# Altium PCB LCC_PCB.PcbDoc (part 2 of 2)
Units mm, origin at the board's own origin, x right, y up, seen from the top; angles counter-clockwise.
Board outline 253 x 208 mm, 4 copper layers (Top Layer, Layer 1, Layer 2, Bottom Layer), stack 0.603 mm thick; 172 components, 110 nets, 492 pads, 79 vias.
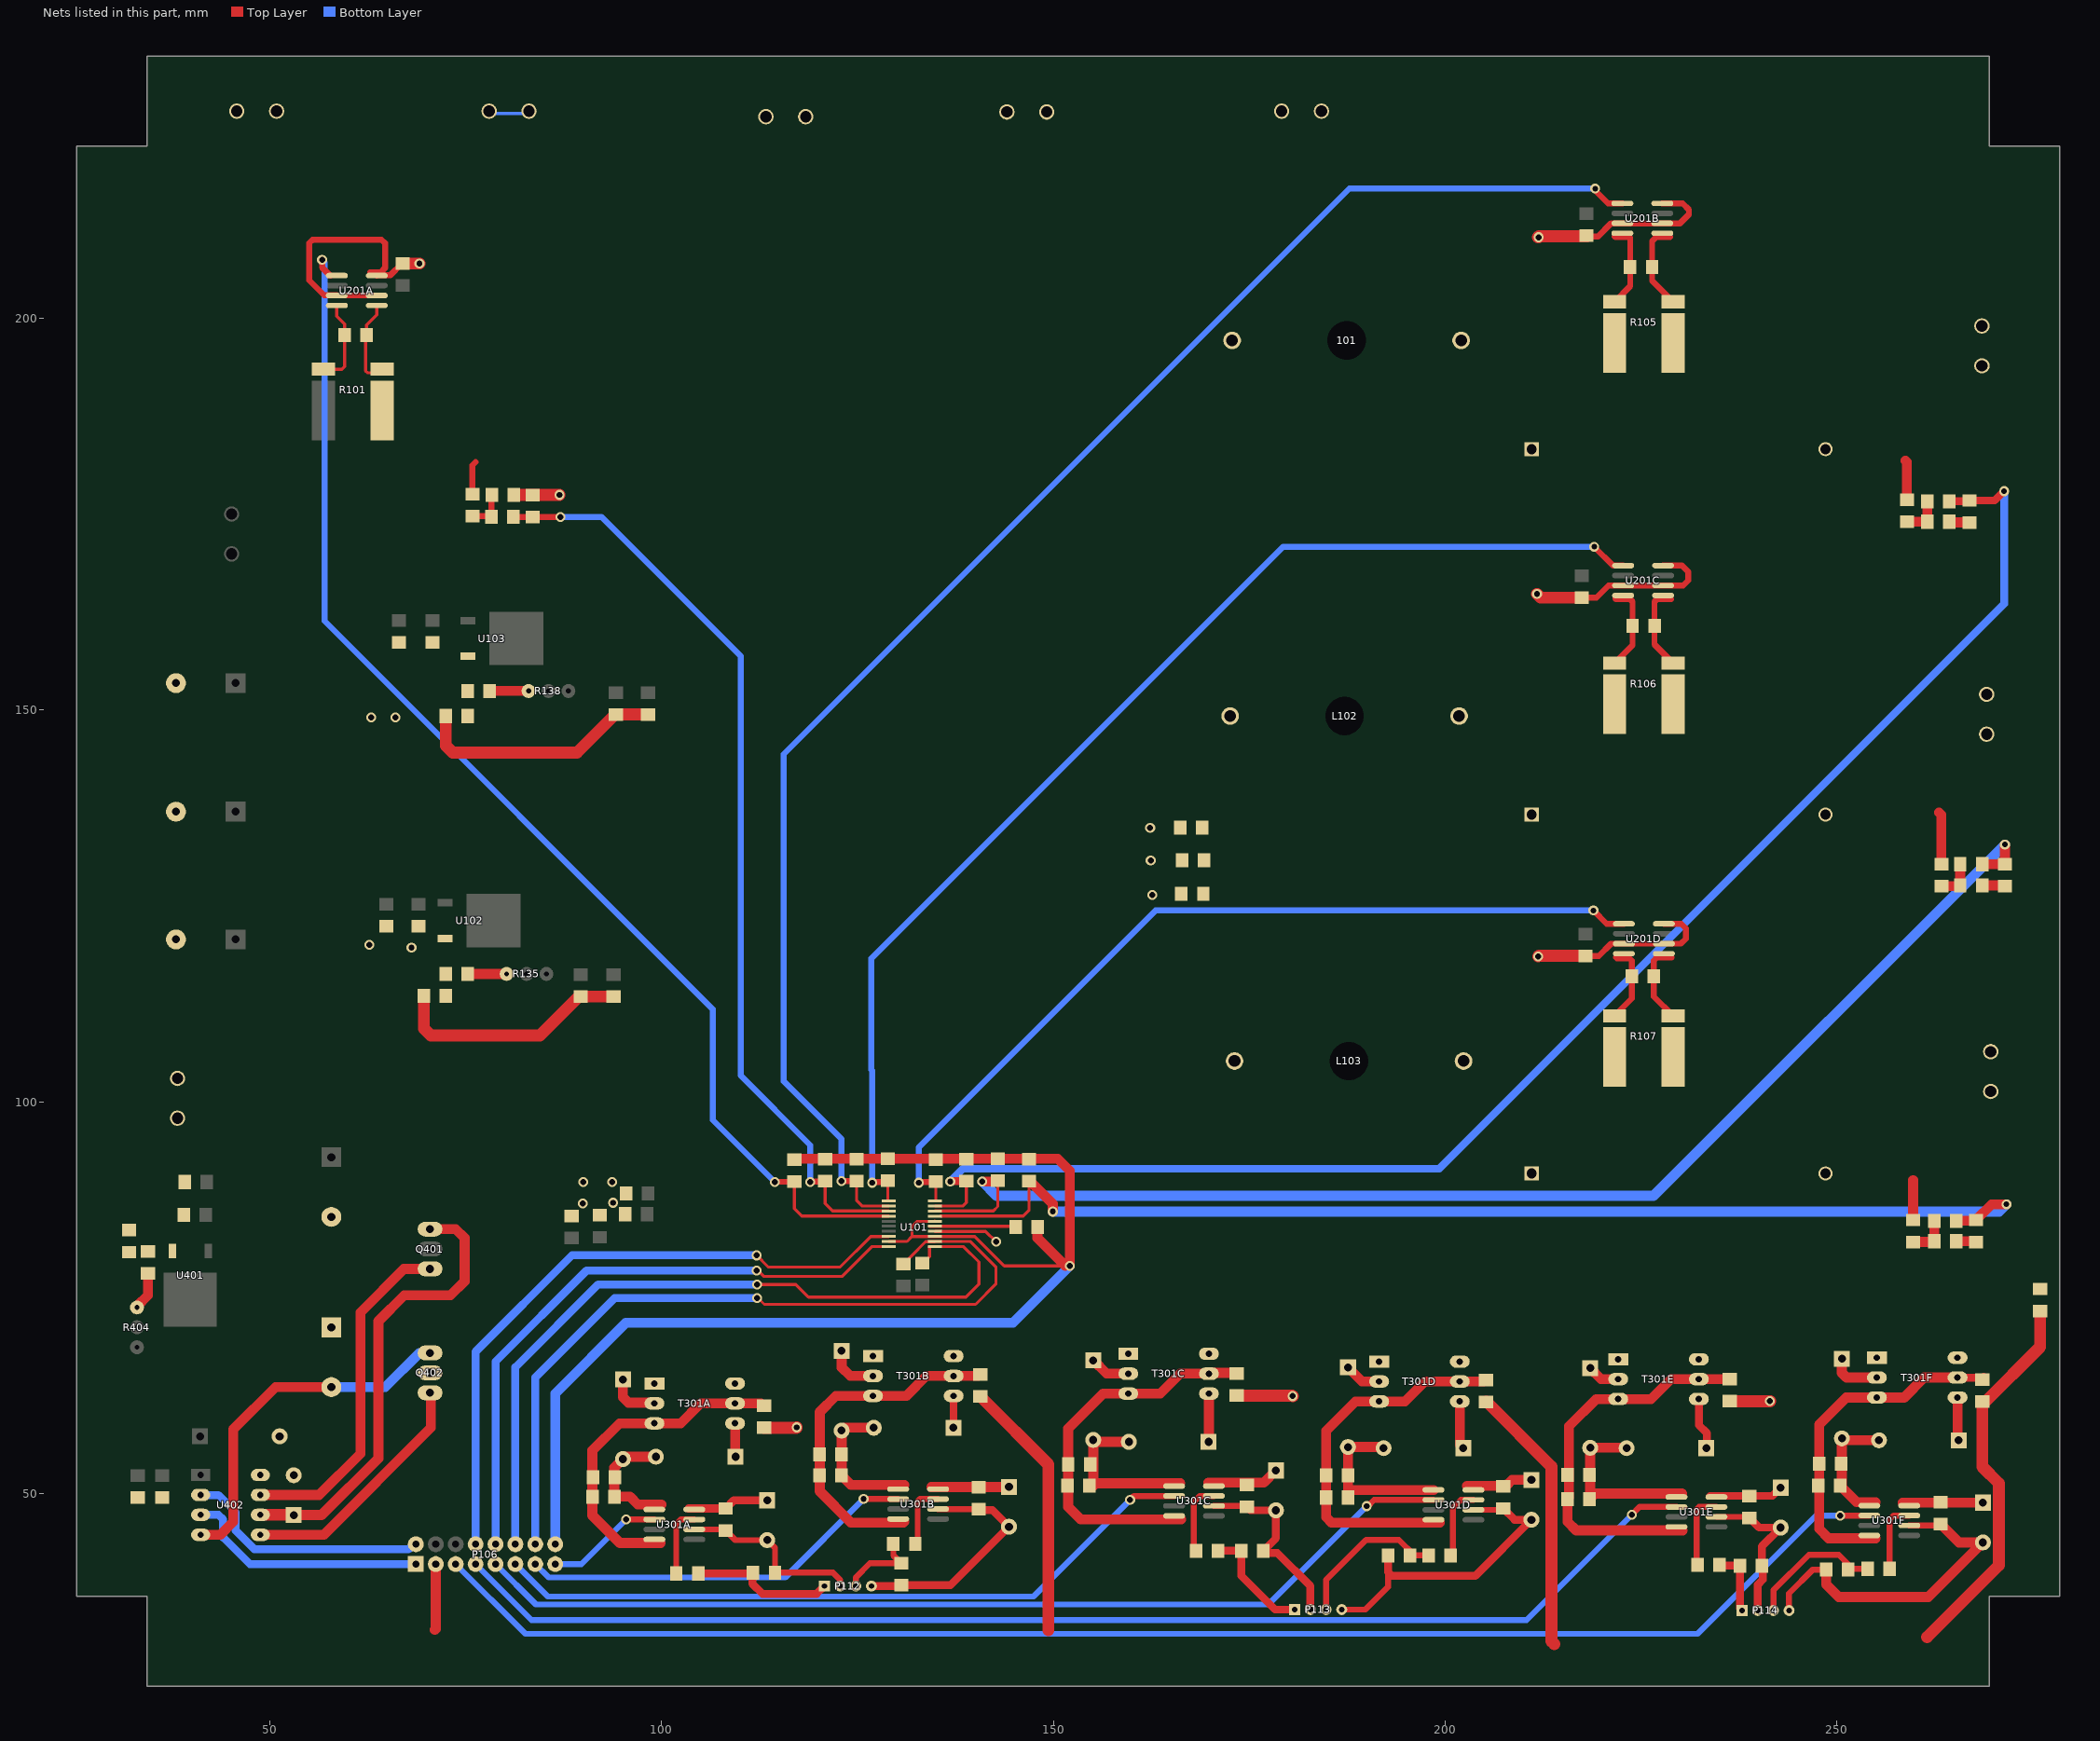
[diagram p4: the nets of this part, all layers, seen from the top]

## Via types
v1: diameter 1.27, hole 0.762, Top Layer to Bottom Layer, 47 vias
v2: diameter 1.27, hole 0.381, Top Layer to Bottom Layer, 22 vias
v3: diameter 1.27, hole 0.711, Top Layer to Bottom Layer, 6 vias
v4: diameter 5, hole 3, Top Layer to Bottom Layer, 4 vias

## Nets (pads, with @x,y where several pads share a name; then routed paths per layer and width w, separated by ;. In a path a pad name is that pad's centre, name@x,y a point inside that pad or via, vN(x,y) a via of type N, cw(c..) or ccw(c..) an arc to the next point about the centre after c; other vN are vias at no path point) (continued)
GND: C101.2 C102.2 C103.2 C104.1 C116.1 C117.1 C118.1 C119.1 C120.1 C121.1 C122.1 C123.1 C124.1 C125.1 C126.1 C127.1 C128.1 C201A.1 C201B.1 C201C.1 C201D.1 C401.1 C402.1 C403.1 C404.1 C407.2 P102.1 P102.2 P106.3 P106.16 P108.1 P108.2 Q402.3 R104.1 R109.2 R123.1 R124.1 R125.1 R126.1 R127.1 R128.1 R129.1 R130.1 R133.1 R136.1 R139.1 R142.1 R143.2 R306A.2 R306B.2 R306C.2 R306D.2 R306E.2 R306F.2 R402.1 U101.3 U101.4 U101.6 U101.19 U201A.2 U201A.4 U201A.7 U201B.2 U201B.4 U201B.7 U201C.2 U201C.4 U201C.7 U201D.2 U201D.4 U201D.7 U402.4 | length 551
  Top Layer w0.381: U101.19@129.007,82.15 129.013,82.15 129.028,82.165 131.339,82.165 131.974,82.8 ; U101.4@134.9,83.45 141.365,83.45 v1(142.697,82.118) ; U101.6@134.9,84.75 134.864,84.75 134.849,84.735 132.639,84.735 131.974,84.07 131.974,82.8 ; v1(152.121,79.045) 151.549,79.045 143.739,79.045 139.983,82.8 U101.3@134.9,82.8 131.974,82.8
  Top Layer w0.762: 62.84,205.816 64.186,205.816 64.745,206.375 64.745,209.535 64.298,209.982 55.514,209.982 55.067,209.535 55.067,204.8 56.979,202.888 58.565,202.888 U201A.7@58.596,202.857 U201A.2@63.696,202.857 ; U201A.4@63.696,205.397 63.727,205.428 65.399,205.428 66.905,206.934 C201A.1@67.005,206.934 ; C201C.1@217.4,164.3 219.3,164.3 220.857,165.857 U201C.7@222.696,165.857 U201C.2@227.796,165.857 230.357,165.857 231,166.5 231,167.6 230.203,168.397 U201C.4@227.796,168.397 ; C201D.1@217.9,118.6 219.6,118.6 221.157,120.157 U201D.7@222.796,120.157 U201D.2@227.896,120.157 230.057,120.157 230.7,120.8 230.7,122.1 230.103,122.697 U201D.4@227.896,122.697 ; C201B.1@218.1,210.4 219.5,210.4 221.17,212.07 U201B.7@222.6,212.07 U201B.2@227.7,212.07 229.97,212.07 231.1,213.2 231.1,213.8 230.3,214.6 227.71,214.6 U201B.4@227.7,214.61
  Top Layer w1.27: U402.4@41.221,44.746 43.746,44.746 45.4,46.4 45.4,58.2 50.78,63.58 C407.2@57.9,63.58 ; 71.1,32.6 71.22,32.72 P106.3@71.22,41 ; R128.1@116.963,92.6 117.098,92.735 124.895,92.735 135,92.735 150.546,92.735 152.121,91.161 v1(152.121,79.045) ; C120.1@147.986,84.023 147.986,82.607 v1@151.549,79.045
  Top Layer w1.524: C201A.1@67.005,206.934 v1(69.139,206.934) ; R133.1@69.7,113.5 69.7,109.325 70.593,108.433 84.506,108.433 89.484,113.411 89.495,113.4 C124.1@89.7,113.4 C123.1@93.9,113.4 ; R136.1@72.5,149.2 72.5,145.419 73.393,144.526 89.226,144.526 94.1,149.4 C127.1@94.2,149.4 C128.1@98.3,149.4 ; R104.1@81.2,177.4 81.219,177.419 v1(86.995,177.419) ; R306A.2@113.1,58.4 117.226,58.4 v1(117.272,58.445) ; R306B.2@140.7,62.4 140.8,62.4 140.838,62.362 140.838,62.262 149.377,53.723 149.377,32.588 ; R306C.2@173.4,62.5 180.476,62.5 v1(180.543,62.433) ; R306D.2@205.2,61.7 205.3,61.7 213.538,53.462 213.538,31.191 213.919,30.81 ; v1(211.709,164.77) 212.179,164.3 C201C.1@217.4,164.3 ; v1(211.861,118.516) 211.945,118.6 C201D.1@217.9,118.6 ; v1(211.912,210.287) 211.836,210.287 211.949,210.4 C201B.1@218.1,210.4 ; R306E.2@236.3,61.8 236.327,61.773 241.452,61.773 241.427,61.798 v1(241.402,61.798) ; 261.469,31.695 270.632,40.858 270.632,51.323 268.53,53.425 R306F.2@268.53,61.594 ; R306F.2@268.53,61.73 R306F.2@268.53,61.594 ; R139.1@275.895,73.304 275.895,68.707 268.656,61.468 R306F.2@268.53,61.594
  Bottom Layer w1.27: C407.2@57.9,63.58 64.78,63.58 69.14,67.94 Q402.3@70.5,67.94 ; P106.16@86.2,43.5 P106.16@86.24,43.54 ; P106.16@86.46,43.54 P106.16@86.24,43.54 ; v1(152.121,79.045) 144.856,71.78 95.48,71.78 86.46,62.76 86.46,43.76 P106.16@86.24,43.54
  other v1: 89.967,86.995 93.853,87.097 90.043,89.738 93.726,89.738 68.123,119.659 62.738,120.015 162.636,126.365 162.433,130.785 162.357,134.925 62.967,149.022 66.091,149.022
HIN1: P106.15 U301A.2 | length 15
  Top Layer w0.762: v1(95.5,46.7) 95.507,46.693 U301A.2@99.104,46.693
  Bottom Layer w0.762: P106.15@86.46,41 89.8,41 v1(95.5,46.7)
HIN2: P106.13 U301B.2 | length 51.1
  Top Layer w0.762: v1(125.8,49.3) 125.807,49.293 U301B.2@130.204,49.293
  Bottom Layer w0.762: P106.13@83.92,41 85.62,39.3 115.8,39.3 v1(125.8,49.3)
HIN3: P106.11 U301C.2 | length 91.1
  Top Layer w0.762: v1(159.8,49.2) 160.293,49.693 U301C.2@165.404,49.693
  Bottom Layer w0.762: P106.11@81.38,41 85.515,36.865 147.465,36.865 v1(159.8,49.2)
HIN4: P106.9 U301D.2 | length 127.3
  Top Layer w0.762: v1(190,48.4) 190.137,48.4 190.93,49.193 U301D.2@198.504,49.193
  Bottom Layer w0.762: P106.9@78.84,41 83.991,35.849 177.449,35.849 v1(190,48.4)
HIN5: P106.7 U301E.2 | length 162.3
  Top Layer w0.762: v1(223.8,47.3) 224.793,48.293 U301E.2@229.504,48.293
  Bottom Layer w0.762: P106.7@76.1,41 P106.7@76.3,41 83.435,33.865 210.365,33.865 v1(223.8,47.3)
HIN6: P106.5 U301F.2 | length 190.3
  Top Layer w0.762: v1(250.407,47.193) U301F.2@254.104,47.193
  Bottom Layer w0.762: P106.5@73.76,41 82.66,32.1 232.2,32.1 247.293,47.193 v1(250.407,47.193)
HINP: P106.2 U402.2 | length 32
  Bottom Layer w1: U402.2@41.221,49.826 41.247,49.8 43.5,49.8 45.7,47.6 45.7,45.275 48.075,42.9 67.761,42.9 68.401,43.54 P106.2@68.68,43.54
HN: C405.1 Q401.3 Q402.2 T301A.1 T301B.1 T301C.1 T301D.1 T301E.1 T301F.1 U402.6 | length 59.1
  Top Layer w1.27: C405.1@53.1,47.26 56.66,47.26 63.9,54.5 63.9,72 67.2,75.3 73.1,75.3 74.9,77.1 74.9,82.6 73.76,83.74 Q401.3@70.5,83.74
  Top Layer w1.524: U402.6@48.841,47.286 53.074,47.286 C405.1@53.1,47.26
HO: Q401.1 U402.7 | length 44.1
  Top Layer w1.27: U402.7@48.841,49.826 56.326,49.826 61.6,55.1 61.6,73.1 67.16,78.66 Q401.1@70.5,78.66
HO1: P112.1 R303A.2 R304A.1 | length 18.4
  Top Layer w1: R303A.2@104.7,39.8 111.6,39.8 111.6,38.5 112.9,37.2 119.8,37.2 P112.1@120.8,38.2
HO2: P112.3 R303B.2 R304B.1 | length 10.6
  Top Layer w0.762: P112.3@124.8,38.2 124.8,39.3 126.6,41.1 R304B.1@130.6,41.1 129.6,42.1 R303B.2@129.6,43.6
HO3: P113.1 R303C.2 R304C.1 | length 14.8
  Top Layer w1: R303C.2@171,42.7 R304C.1@174,42.7 174,39.5 178.3,35.2 P113.1@180.8,35.2
HO4: P113.3 R303D.2 R304D.1 | length 22.2
  Top Layer w0.762: P113.3@184.8,35.2 184.8,39 189.9,44.1 194.1,44.1 196.1,42.1 R303D.2@197.9,42.1 R304D.1@195.5,42.1
HO5: P114.1 R303E.2 R304E.1 | length 8.5
  Top Layer w1: R303E.2@235,40.9 235.1,40.8 R304E.1@237.6,40.8 237.6,35.346 P114.1@237.866,35.08
HO6: P114.3 R303F.2 R304F.1 | length 17.7
  Top Layer w0.762: P114.3@241.866,35.08 241.866,37.666 246.4,42.2 250.2,42.2 251.4,41 R304F.1@251.4,40.3 251.5,40.4 253.5,40.4 R303F.2@253.9,40.4
IS+1: C111.2 R101.2 U201A.8 | length 11
  Top Layer w0.381: R101.2@56.905,193.449 59.249,193.449 59.6,193.8 C111.2@59.6,197.8 59.6,199.2 58.596,200.204 U201A.8@58.596,201.587
IS+2: C112.2 R105.2 U201B.8 | length 11.1
  Top Layer w0.762: R105.2@221.6,202.058 223.6,204.058 C112.2@223.6,206.5 223.6,210.2 223.5,210.3 221.7,210.3 221.6,210.4
IS+3: C113.2 R106.2 U201C.8 | length 11.2
  Top Layer w0.762: R106.2@221.6,155.958 223.9,158.258 C113.2@223.9,160.7 223.9,163.8 223.6,164.1 221.8,164.1 221.7,164.2
IS+4: C114.2 R107.2 U201D.8 | length 10.1
  Top Layer w0.762: R107.2@221.6,110.958 223.8,113.158 C114.2@223.8,116 223.8,118 223.5,118.3 221.9,118.3 221.8,118.4
IS-1: C111.1 R101.3 U201A.1 | length 11.3
  Top Layer w0.381: U201A.1@63.696,201.587 63.696,200.396 62.4,199.1 C111.1@62.4,197.8 62.271,197.671 62.271,193.223 62.494,193 63.924,193 R101.3@64.373,193.449
IS-2: C112.1 R105.3 U201B.1 | length 11.4
  Top Layer w0.762: 228.7,210.3 226.9,210.3 226.4,209.8 C112.1@226.4,206.5 226.4,204.725 R105.3@229.068,202.058
IS-3: C113.1 R106.3 U201C.1 | length 11
  Top Layer w0.762: 228.8,164.1 227,164.1 226.7,163.8 C113.1@226.7,160.7 226.7,158.325 R106.3@229.068,155.958
IS-4: C114.1 R107.3 U201D.1 | length 10.5
  Top Layer w0.762: 228.9,118.4 227,118.4 226.6,118 C114.1@226.6,116 226.6,113.425 R107.3@229.068,110.958
ISO1: R128.2 U101.14 U201A.5 | length 163.5
  Top Layer w0.381: U201A.5@57.785,205.359 57.823,205.397 U201A.5@58.596,205.397 ; R128.2@116.963,89.8 116.963,86.337 117.9,85.4 U101.14@129.007,85.4
  Top Layer w0.762: v1(56.718,207.416) 56.718,206.426 U201A.5@57.785,205.359 ; v1@114.376,89.713 114.445,89.782 116.945,89.782 R128.2@116.963,89.8 ; v1@114.427,89.764 v1(114.478,89.764)
  Bottom Layer w0.762: v1(56.718,207.416) 56.718,207.366 57.048,207.035 57.048,161.315 106.578,111.785 106.578,97.663 v1(114.478,89.764)
ISO2: R124.2 U101.12 U201B.5 | length 204.3
  Top Layer w0.381: R124.2@124.895,89.877 124.895,87.405 125.6,86.7 U101.12@129.007,86.7
  Top Layer w0.762: v1(122.961,89.865) 122.967,89.871 124.889,89.871 R124.2@124.895,89.877 ; v3@219,216.4 220.79,214.61 U201B.5@222.6,214.61
  Bottom Layer w0.762: v1(122.961,89.865) 122.961,95.25 115.601,102.611 115.601,144.328 187.776,216.504 218.968,216.504 219.129,216.665 v3(219.129,216.504)
ISO3: R123.2 U101.11 U201C.5 | length 152.1
  Top Layer w0.381: R123.2@128.9,89.9 128.9,87.363 128.913,87.35 U101.11@129.007,87.35
  Top Layer w0.762: v1(126.898,89.662) 126.996,89.759 128.759,89.759 R123.2@128.9,89.9 ; v3(219,170.8) 221.403,168.397 U201C.5@222.696,168.397
  Bottom Layer w0.762: v1(126.898,89.662) 126.898,103.967 126.771,104.094 126.771,118.262 179.309,170.8 v3(219,170.8)
ISO4: R125.2 U101.10 U201D.5 | length 112.4
  Top Layer w0.381: U101.10@135,87.35 R125.2@135,89.8
  Top Layer w0.762: v1(132.842,89.662) 132.911,89.731 134.931,89.731 R125.2@135,89.8 ; v3(218.9,124.4) 220.603,122.697 U201D.5@222.796,122.697
  Bottom Layer w0.762: v1(132.842,89.662) 132.842,94.174 163.068,124.4 218.678,124.4 218.745,124.333 218.812,124.4 v3(218.9,124.4)
LINP: P106.1 U402.3 | length 31.4
  Bottom Layer w1: U402.3@41.221,47.286 43.514,47.286 44.1,46.7 44.1,44.4 47.5,41 P106.1@68.68,41
LO: Q402.1 U402.5 | length 31.9
  Top Layer w1.27: U402.5@48.841,44.746 56.946,44.746 70.6,58.4 70.6,62.76 Q402.1@70.5,62.86
Net101_1: 101.1 P109.1 P109.2
Net101_2: 101.2 R105.1
NetC105_1: C105.1 C106.1 C107.1 R109.1 R142.2 R143.1
NetC105_2: C105.2 P103.1 P103.2 R105.4 R112.2 | length 5.1
  Top Layer w1.27: 258.7,181.8 258.9,181.6 R112.2@258.9,176.8
NetC106_2: C106.2 P104.1 P104.2 R106.4 R115.2 | length 6.7
  Top Layer w1.27: 263,136.9 263.3,136.6 R115.2@263.3,130.3
NetC107_2: C107.2 P105.1 P105.2 R107.4 R118.2 | length 5.1
  Top Layer w1.27: R118.2@259.7,84.9 259.7,90
NetC108_1: C108.1 C109.1 C110.1 R113.1 R116.1 R119.1 R139.2 | length 8.1
  Top Layer w1.27: R113.1@264.3,174 264.4,173.9 C108.1@266.9,173.9 ; R119.1@265.2,82.2 267.6,82.2 C110.1@267.7,82.1 ; R116.1@268.5,127.6 271.3,127.6 C109.1@271.4,127.5
NetC120_2: C120.2 U101.5 | length 11
  Top Layer w0.381: U101.5@134.2,84.1 U101.5@134.9,84.1 C120.2@145.186,84.1
NetC301A_1: C301A.1 C302A.1 R306A.1 T301A.3 T301A.5 U301A.4 | length 43
  Top Layer w1.27: 99.9,43.7 94.7,43.7 91.2,47.2 C302A.1@91.2,49.6 91.2,55.5 94.66,58.96 T301A.3@99.113,58.96 102.46,58.96 105,61.5 T301A.5@109.4,61.5 112.7,61.5 113,61.2 R306A.1@113.1,61.2
NetC301A_2: C301A.2 C302A.2 D302A.K D303A.K U301A.1 | length 16.1
  Top Layer w1.27: D302A.K@99.3,54.7 95.4,54.7 D303A.K@95.1,54.4 94,53.3 C302A.2@94,49.6 96,49.6 97,48.6 100,48.6
  Bottom Layer w0.381: D302A.K@99.3,54.7 D302A.K@99.35,54.65
NetC301B_1: C301B.1 C302B.1 R306B.1 T301B.3 T301B.5 U301B.4 | length 45.1
  Top Layer w1.27: 131,46.4 130.9,46.3 124.2,46.3 120.2,50.3 120.2,60.4 122.26,62.46 T301B.3@127,62.46 131.26,62.46 133.8,65 T301B.5@137.287,65 140.4,65 140.6,65.2 R306B.1@140.7,65.2
NetC301B_2: C301B.2 C302B.2 D302B.K D303B.K U301B.1 | length 18.5
  Top Layer w1.27: D302B.K@127.1,58.4 123.36,58.4 D303B.K@123,58.04 C302B.2@123,52.3 124.2,51.1 131,51.1
NetC301C_1: C301C.1 C302C.1 R306C.1 T301C.3 T301C.5 U301C.4 | length 49.5
  Top Layer w1.27: 166.3,46.7 165.404,46.7 153.5,46.7 151.9,48.3 151.9,51 C301C.1@151.9,53.716 151.9,58.3 156.357,62.757 T301C.3@159.57,62.757 163.657,62.757 166.197,65.297 T301C.5@169.857,65.297 169.96,65.4 R306C.1@173.4,65.4
NetC301C_2: C301C.2 C302C.2 D302C.K D303C.K U301C.1 | length 22.6
  Top Layer w1.27: C302C.2@154.85,51.3 C302C.2@154.9,51.3 ; C302C.2@155.1,51 C302C.2@154.6,51 C302C.2@154.9,51.3 ; D302C.K@159.64,56.6 155.34,56.6 D303C.K@155.1,56.84 155.1,51.5 C302C.2@154.9,51.3 ; U301C.1@166.218,51.3 C302C.2@154.9,51.3
NetC301D_1: C301D.1 C302D.1 R306D.1 T301D.3 T301D.5 U301D.4 | length 48.9
  Top Layer w1.27: 199.3,46.3 185.5,46.3 184.8,47 C302D.1@184.8,49.5 C301D.1@184.8,52.3 184.8,58 188.557,61.757 T301D.3@191.57,61.757 194.857,61.757 197.397,64.297 T301D.5@201.857,64.297 204.897,64.297 205.1,64.5 R306D.1@205.2,64.5
NetC301D_2: C301D.2 C302D.2 D302D.K D303D.K U301D.1 | length 22
  Top Layer w1.27: C302D.2@187.6,49.5 187.6,50.4 ; D302D.K@192.14,55.8 192,55.94 D303D.K@187.6,55.94 187.6,50.4 ; U301D.1@198.504,50.463 187.663,50.463 187.6,50.4
NetC301E_1: C301E.1 C302E.1 R306E.1 T301E.3 T301E.5 U301E.4 | length 50.1
  Top Layer w1.27: C302E.1@215.6,49.3 215.6,46.4 216.7,45.3 230.3,45.3 ; C302E.1@215.8,49.5 215.8,58.6 219.257,62.057 T301E.3@222.07,62.057 226.257,62.057 228.797,64.597 T301E.5@232.357,64.597 232.358,64.599 R306E.1@236.3,64.6 R306E.1@236.3,64.6
NetC301E_2: C301E.2 C302E.2 D302E.K D303E.K U301E.1 | length 23.2
  Top Layer w1.27: C302E.2@218.4,49.3 C302E.2@218.5,49.4 ; D302E.K@223.14,55.8 223.1,55.84 D303E.K@218.5,55.84 C302E.2@218.5,49.4 ; 230.2,50 219.1,50 C302E.2@218.5,49.4
NetC301F_1: C301F.1 C302F.1 R306F.1 T301F.3 T301F.5 U301F.4 | length 44.6
  Top Layer w1: T301F.5@265.357,64.797 268.597,64.797 R306F.1@268.7,64.9 ; R306F.1@268.53,64.53 R306F.1@268.56,64.56
  Top Layer w1.27: 254.9,44.3 254.104,44.3 248.9,44.3 247.7,45.5 247.7,51 C302F.1@247.7,53.8 247.7,58.8 251.157,62.257 T301F.3@255.07,62.257 258.557,62.257 261.097,64.797 T301F.5@265.357,64.797
NetC301F_2: C301F.2 C302F.2 D302F.K D303F.K U301F.1 | length 16.3
  Top Layer w1.27: 254.9,48.9 252.5,48.9 C301F.2@250.4,51 250.6,51.2 D303F.K@250.6,57.04 250.84,56.8 D302F.K@255.34,56.8
NetC303A_1: C303A.1 C304A.2 U301A.8 | length 10.4
  Top Layer w1.016: U301A.8@103.5,48.1 C304A.2@108.2,48.1 109.24,49.14 C303A.1@113.5,49.14
NetC303B_1: C303B.1 C304B.2 U301B.8 | length 9.9
  Top Layer w1.27: U301B.8@134.46,50.84 C303B.1@144.348,50.84
NetC303C_1: C303C.1 C304C.2 U301C.8 | length 9.2
  Top Layer w1.27: 169.8,51.4 176.86,51.4 C303C.1@178.4,52.94
NetC303D_1: C303D.1 C304D.2 U301D.8 | length 8.5
  Top Layer w1.27: 202.8,51 207.8,51 208.54,51.74 C303D.1@211,51.74
NetC303E_1: C303E.1 C304E.2 U301E.8 | length 9.4
  Top Layer w1: U301E.8@233.8,49.7 C304E.2@238.8,49.7 241.76,49.7 C303E.1@242.8,50.74
NetC303F_1: C303F.1 C304F.2 U301F.8 | length 10.2
  Top Layer w1.27: 258.36,48.84 C303F.1@268.6,48.84
NetC405_2: C405.2 D401.K U402.8
NetC406_2: C406.2 C407.1 T301A.6 T301B.6 T301C.6 T301D.6 T301E.6 T301F.6
NetD302A_A: D302A.A T301A.4 | length 4.3
  Top Layer w1.27: T301A.4@109.4,58.96 109.4,54.76 D302A.A@109.46,54.7
NetD302B_A: D302B.A T301B.4 | length 4.2
  Top Layer w1: D302B.A@137.26,58.4 137.274,58.414 137.274,62.374 T301B.4@137.4,62.5 ; T301B.4@137.287,62.46 T301B.4@137.36,62.46
NetD302C_A: D302C.A T301C.4 | length 6.2
  Top Layer w1.27: D302C.A@169.8,56.6 169.857,56.657 T301C.4@169.857,62.757
NetD302D_A: D302D.A T301D.4 | length 6.1
  Top Layer w1.27: T301D.4@201.857,61.757 201.857,56.243 D302D.A@202.3,55.8
NetD302E_A: D302E.A T301E.4 | length 6.7
  Top Layer w1: T301E.4@232.357,62.057 232.357,58.743 233.4,57.7 233.4,55.9 D302E.A@233.3,55.8
NetD302F_A: D302F.A T301F.4 | length 5.5
  Top Layer w1.27: T301F.4@265.357,62.257 265.357,56.943 D302F.A@265.5,56.8
NetD303A_A: D303A.A T301A.2 | length 6.6
  Top Layer w1.27: D303A.A@95.1,64.56 95.1,62.3 95.8,61.6 99.013,61.6 T301A.2@99.113,61.5
NetD303B_A: D303B.A T301B.2 | length 6.6
  Top Layer w1.27: D303B.A@123,68.2 123,66.1 124.1,65 T301B.2@127,65
NetD303C_A: D303C.A T301C.2 | length 5.2
  Top Layer w1.27: D303C.A@155.1,67 156.803,65.297 T301C.2@159.57,65.297
NetD303D_A: D303D.A T301D.2 | length 4.7
  Top Layer w1.27: D303D.A@187.6,66.1 189.403,64.297 T301D.2@191.57,64.297
NetD303E_A: D303E.A T301E.2 | length 4.2
  Top Layer w1.27: D303E.A@218.5,66 219.903,64.597 T301E.2@222.07,64.597
NetD303F_A: D303F.A T301F.2 | length 6.5
  Top Layer w1.27: D303F.A@250.6,67.2 250.6,65.4 251.203,64.797 T301F.2@255.07,64.797
NetL102_1: L102.1 P110.1 P110.2
NetL102_2: L102.2 R106.1
NetL103_1: L103.1 P111.1 P111.2
NetL103_2: L103.2 R107.1
NetP107_1: P107.1 P107.2 R101.4 R102.2 | length 9.3
  Top Layer w0.762: R102.2@75.9,177.5 75.9,181.2 76.3,181.6
  Bottom Layer w0.381: P107.2@78.033,226.073 P107.1@83.113,226.073
NetR102_1: R102.1 R103.2 R104.2 | length 5.3
  Top Layer w0.762: R102.1@75.9,174.7 78.2,174.7 R103.2@78.3,174.6 78.3,177.3 R104.2@78.4,177.4
NetR112_1: R112.1 R113.2 R114.2 | length 5.2
  Top Layer w1.27: R112.1@258.9,174 R113.2@261.5,174 R114.2@261.5,176.6
NetR115_1: R115.1 R116.2 R117.2 | length 5.1
  Top Layer w1.27: R115.1@263.3,127.5 265.6,127.5 R116.2@265.7,127.6 R117.2@265.7,130.3
NetR118_1: R118.1 R119.2 R120.2 | length 5.3
  Top Layer w1.27: R118.1@259.7,82.1 262.3,82.1 R119.2@262.4,82.2 R120.2@262.4,84.8
NetR133_2: R133.2 R134.2 U102.3 | length 0.5
  Top Layer w0.381: R134.2@72.15,116.65 R134.2@72.5,116.3
NetR134_1: R134.1 R135.1 | length 5
  Top Layer w1.27: R134.1@75.3,116.3 R135.1@80.26,116.3
NetR136_2: R136.2 R137.2 U103.3
NetR137_1: R137.1 R138.1 | length 5
  Top Layer w1.27: R137.1@78.1,152.4 R138.1@83.06,152.4
NetR303A_1: R303A.1 U301A.7 | length 8.8
  Top Layer w0.762: R303A.1@101.9,39.8 101.9,46.1 102.493,46.693 U301A.7@104.204,46.693
NetR303B_1: R303B.1 U301B.7 | length 8.1
  Top Layer w0.762: R303B.1@132.7,43.6 132.7,49 132.993,49.293 U301B.7@135.304,49.293
NetR303C_1: R303C.1 U301C.7 | length 9.3
  Top Layer w0.762: R303C.1@168.2,42.7 167.9,43 167.9,48.9 168.693,49.693 U301C.7@170.504,49.693
NetR303D_1: R303D.1 U301D.7 | length 9.2
  Top Layer w0.762: R303D.1@200.7,42.1 201,42.4 201,48.2 201.993,49.193 U301D.7@203.604,49.193
NetR303E_1: R303E.1 U301E.7 | length 10.1
  Top Layer w0.762: R303E.1@232.1,40.5 232.1,48 232.393,48.293 U301E.7@234.604,48.293
NetR303F_1: R303F.1 U301F.7 | length 9
  Top Layer w0.762: R303F.1@256.7,40.4 256.7,46.7 257.193,47.193 U301F.7@259.204,47.193
NetR402_2: R402.2 R403.2 U401.3
NetR403_1: R403.1 R404.1 | length 4.9
  Top Layer w1.27: R404.1@33.1,73.747 33.1,73.9 34.5,75.3 R403.1@34.5,78.1
SPI2(ADC)-MISO: P106.8 U101.18 | length 84.6
  Top Layer w0.381: v1(112.141,80.391) 113.64,78.892 122.809,78.892 126.717,82.8 U101.18@129.007,82.8
  Bottom Layer w0.381: P106.8@76.3,43.54 P106.8@76.3,44.5
  Bottom Layer w1.016: P106.8@76.3,44.5 76.3,68.1 88.591,80.391 v1(112.141,80.391)
SPI2(ADC)-MOSI: P106.14 R132.1 U101.2 | length 102.2
  Top Layer w0.381: v1(112.217,74.93) 112.349,74.93 113.136,74.143 113.46,74.143 140.081,74.143 142.672,76.733 142.672,78.924 139.446,82.15 U101.2@134.9,82.15 134.887,82.137 133.701,82.137 131.929,80.365 131.929,80.348 131.596,80.014 131.596,79.914 130.986,79.305 R132.1@130.886,79.305
  Bottom Layer w1.016: P106.14@83.92,43.54 83.92,64.82 94.03,74.93 v1(112.217,74.93)
SPI2(ADC)-NCS: P106.12 R131.1 U101.1@134.9,81.5 | length 99.9
  Top Layer w0.381: v1(112.217,76.657) 117.17,76.657 118.77,75.057 138.862,75.057 140.513,76.708 140.513,79.553 138.566,81.5 U101.1@134.9,81.5 134.214,81.5 134.201,81.487 134.201,80.209 133.374,79.381 R131.1@133.274,79.381
  Bottom Layer w1.016: P106.12@81.38,43.54 81.38,66.12 91.917,76.657 v1(112.217,76.657)
SPI2(ADC)-SCK: P106.10 U101.20 | length 80.2
  Top Layer w0.381: v1(112.141,78.461) 112.323,78.461 113.085,77.699 123.038,77.699 126.839,81.5 U101.20@129.007,81.5
  Bottom Layer w1.016: P106.10@78.84,43.54 78.84,66.84 90.461,78.461 v1(112.141,78.461)
VS1: C303A.2 C304A.1 P112.2 R304A.2 U301A.6 | length 23.9
  Top Layer w0.762: U301A.6@104.204,45.423 108.077,45.423 C304A.1@108.2,45.3 109.44,44.06 C303A.2@113.5,44.06 114.5,43.06 R304A.2@114.5,39.9 121.9,39.9 122.8,39 P112.2@122.8,38.2
VS2: C303B.2 C304B.1 P112.4 R304B.2 U301B.6 | length 30.7
  Top Layer w0.762: U301B.6@135.304,48.023 140.477,48.023 C304B.1@140.5,48
  Top Layer w1: P112.4@126.8,38.2 130.5,38.2 R304B.2@130.6,38.3 136.877,38.3 C303B.2@144.348,45.771 142.22,47.899 140.601,47.899 C304B.1@140.5,48
VS3: C303C.2 C304C.1 P113.2 R304C.2 U301C.6 | length 24.8
  Top Layer w0.762: U301C.6@170.504,48.423 174.577,48.423 C304C.1@174.7,48.3
  Top Layer w1: C304C.1@174.7,48.3 175.14,47.86 C303C.2@178.4,47.86 178.4,44.3 R304C.2@176.8,42.7 177.1,42.4 178.6,42.4 182.8,38.2 P113.2@182.8,35.2
VS4: C303D.2 C304D.1 P113.4 R304D.2 U301D.6 | length 40.6
  Top Layer w0.762: P113.4@186.8,35.2 189.8,35.2 192.7,38.1 192.7,40 ; U301D.6@203.604,47.923 207.223,47.923 C304D.1@207.4,48.1
  Top Layer w1: R304D.2@192.7,42.1 192.7,40 193.2,39.5 203.84,39.5 C303D.2@211,46.66 208.84,46.66 C304D.1@207.4,48.1
VS5: C303E.2 C304E.1 P114.2 R304E.2 U301E.6 | length 20.6
  Top Layer w0.762: U301E.6@234.604,47.023 238.677,47.023 C304E.1@238.8,46.9
  Top Layer w1: C304E.1@238.8,46.9 240.04,45.66 C303E.2@242.8,45.66 240.4,43.26 R304E.2@240.4,40.8 240.5,40.7 240.5,39 239.866,38.366 P114.2@239.866,35.08
VS6: C303F.2 C304F.1 P114.4 R304F.2 U301F.6 | length 44.1
  Top Layer w0.762: P114.4@243.866,35.08 243.866,37.266 246.9,40.3 R304F.2@248.6,40.3 ; U301F.6@259.204,45.923 263.023,45.923 C304F.1@263.2,46.1
  Top Layer w1.27: R304F.2@248.6,40.3 248.6,38.4 250.2,36.8 261.64,36.8 C303F.2@268.6,43.76 265.54,43.76 C304F.1@263.2,46.1
VS+1: C104.2 R103.1 R127.2 U101.13 | length 120.5
  Top Layer w0.381: R127.2@120.9,89.877 120.9,87 121.85,86.05 U101.13@129.007,86.05
  Top Layer w0.762: R103.1@81.1,174.6 C104.2@83.6,174.6 v1(87.122,174.6) ; v1(118.974,89.764) 119.03,89.82 120.843,89.82 R127.2@120.9,89.877
  Bottom Layer w0.762: v1(87.122,174.6) 92.379,174.6 110.134,156.845 110.134,103.327 118.999,94.463 118.999,89.789 v1(118.974,89.764)
VS+2: C108.2 R114.1 R126.2 U101.9 | length 195.7
  Top Layer w0.381: U101.9@134.9,86.7 138.5,86.7 138.907,87.107 R126.2@138.907,89.877
  Top Layer w1: v1(136.855,89.814) 136.887,89.846 138.876,89.846 R126.2@138.907,89.877 ; R114.1@264.3,176.6 C108.2@266.7,176.6 ; C108.2@266.9,176.7 270.1,176.7 v3(271.3,177.9)
  Bottom Layer w1: v1(136.855,89.814) 138.481,91.44 199.238,91.44 271.3,163.502 v3(271.3,177.9)
VS+3: C109.2 R117.1 R129.2 U101.8 | length 168.8
  Top Layer w0.381: U101.8@134.9,86.05 142.35,86.05 142.924,86.624 R129.2@142.924,89.9
  Top Layer w1.27: v1(140.919,89.814) 142.838,89.814 R129.2@142.924,89.9 ; R117.1@268.5,130.3 C109.2@271.4,130.3 v3(271.4,132.8)
  Bottom Layer w1.27: v1(140.919,89.814) 142.748,87.986 226.586,87.986 v3(271.4,132.8)
VS+4: C110.2 R120.1 R130.2 U101.7 | length 149.9
  Top Layer w0.381: U101.7@135.598,85.398 146.153,85.398 146.914,86.158 R130.2@146.914,89.877
  Top Layer w1.27: R130.2@146.914,89.877 147.014,89.877 149.936,86.955 v1(149.936,85.979) ; R120.1@265.2,84.8 267.6,84.8 C110.2@267.7,84.9 269.7,86.9 v3(271.6,86.9)
  Bottom Layer w1.27: v1(149.936,85.979) 270.679,85.979 v3(271.6,86.9)
pads on no net: 101.3 L102.3 L103.3 P106.4 U101.1@135.535,80.615 U301A.3 U301A.5 U301B.3 U301B.5 U301C.3 U301C.5 U301D.3 U301D.5 U301E.3 U301E.5 U301F.3 U301F.5
copper on no net:
  other v4: 29.4,40.9 274.4,40.9 29.4,217.9 274.9,217.9

## Polygon pours and split planes (outlines as drawn)
NetC105_1 on Top Layer "NETC105_1_L01_P031" (solid, pour order 31): 217,187 217,179.9 197.7,179.9 197.5,180.1 197.5,140.6 218.8,140.6 218.8,133.5 218.7,133.4 197.5,133.4 197.5,95.7 218.2,95.7 218.2,88.4 182.6,88.4 182.6,123.952 168.25,123.952 168.25,138.219 182.6,138.219 182.6,187 216,187 216.5,187
Net101_2 on Top Layer "NET101_2_L01_P007" (solid, pour order 7): 223.3,200.9 200.4,200.9 200.4,191.2 223.374,191.2
Net101_1 on Top Layer "NET101_1_L01_P004" (solid, pour order 4): 188,230.2 165.4,230.2 165.4,192.4 188,192.4
HN on Top Layer "HN_L01_P033" (solid, pour order 33): 68.9,85 80.2,85 80.2,73.356 256.9,73.356 256.9,66.196 253.525,66.196 253.525,68.656 223.561,68.656 223.561,66.196 220.574,66.196 220.574,68.656 192.885,68.656 192.885,65.916 190.145,65.964 190.145,68.656 160.884,68.656 160.884,67.031 158.293,67.031 158.293,68.656 128.524,68.656 128.524,66.704 125.654,66.704 125.654,68.656 100.656,68.656 100.718,63.029 97.467,63.029 97.467,68.656 80.2,68.656 80.2,64.3 68.9,64.3 68.9,66.6 69.1,66.4 73.3,66.4 73.3,82.8 68.9,82.8
GND on Top Layer "NONET_L-01_P-001" (solid, pour order 40): 96.52,93.015 96.52,84.252 86.741,84.252 86.741,93.015
GND on Top Layer "NONET_L-01_P-001" (solid, pour order 38): 167.056,138.354 167.056,123.85 159.487,123.85 159.487,138.328 159.537,138.379
GND on Top Layer "GND_L01_P032" (solid, pour order 32): 40.5,97.4 26.5,97.4 26.5,44.7 26.4,44.6 33.6,44.6 37.2,41 37.2,26.5 37.1,26.4 267.5,26.4 267.7,26.6 267.7,34 46.5,34 43.4,37.1 43.4,43.3 40.8,45.9 37.2,49.5 37.2,50.5 31.9,50.5 30.9,51.5 30.9,82.8 40.602,82.8
NetC108_1 on Top Layer "NETC108_1_L01_P030" (solid, pour order 30): 277.1,175.1 277.1,74.9 264.2,74.9 264.2,83.4 273.8,83.4 273.8,126.4 267.6,126.4 267.6,128.8 273.8,128.8 273.8,172.7 273.6,172.9 263.3,172.9 263.3,175.1
NetR402_2 on Top Layer "NETR402_2_L01_P024" (solid, pour order 24): 31.2,82.147 38.6,82.147 38.6,79.647 31.2,79.647
NetL103_1 on Top Layer "NETL103_1_L01_P014" (solid, pour order 14): 177.4,114.1 128,114.1 128,229.8 105.4,229.8 105.4,97.6 177.4,97.6
NetL102_1 on Top Layer "NETL102_1_L01_P005" (solid, pour order 5): 178.8,142.3 178.8,160.3 156.32,160.3 156.32,230.1 135.8,230.1 135.8,142.3
+10D on Top Layer "+10D_L01_P025" (solid, pour order 25): 45.5,78.947 36,78.947 36,72.147 32.2,72.147 32.2,51.2 42.87,51.2 42.87,59.89 45.5,59.89
NetC405_2 on Top Layer "NETC405_2_L01_P029" (solid, pour order 29): 47.7,51.6 47.7,58.7 54.7,58.7 54.7,51.6
GND on Top Layer "GND_L01_P023" (solid, pour order 23): 29.2,91.247 39.9,91.247 39.9,82.847 38.6,82.847 29.2,82.847
+12 on Top Layer "+12_L01_P022" (solid, pour order 22): 75.2,127.8 75.2,118.7 82,118.7 82,115.1 97.507,115.1 97.507,83.6 114.5,83.6 114.5,86.417 102.5,86.417 102.5,127.8
NetR133_2 on Top Layer "NETR133_2_L01_P021" (solid, pour order 21): 73.7,121.8 73.7,111.5 71.2,111.5 71.2,121.8 72,121.8
GND on Top Layer "GND_L01_P020" (solid, pour order 20): 61.4,123.4 70.3,123.4 70.3,111.8 69,111.8 61.4,111.8
GND on Top Layer "GND_L01_P019" (solid, pour order 19): 61.468,159.6 73.2,159.6 73.2,148 71.9,148 61.468,148
NetR136_2 on Top Layer "NETR136_2_L01_P018" (solid, pour order 18): 76.4,157.6 76.4,147.3 73.9,147.3 73.9,157.6 74.7,157.6
+10 on Top Layer "+10_L01_P017" (solid, pour order 17): 77.9,164.2 77.9,154.7 84.7,154.7 84.7,151.1 99.6,151.1 99.6,164.2
NetC406_2 on Top Layer "NETC406_2_L01_P015" (solid, pour order 15): 59.949,87.2 55.6,87.2 55.6,71.3 55.6,69 59.949,69
+48 on Top Layer "+48_L01_P001" (solid, pour order 1): 58.6,192.3 58.6,164.2 76.4,164.2 76.4,160.2 58.6,160.2 58.6,127.835 73.603,127.835 73.603,124.076 58.6,124.076 58.6,94.71 67.305,94.71 67.305,82.134 72,82.134 72,80.233 63.718,80.233 63.718,91 47,91 47,79.8 41,79.8 41,94.71 48.214,94.71 48.214,116.2 42.1,116.2 42.1,192.3
NetC106_2 on Top Layer "NETC106_2_L01_P013" (solid, pour order 13): 273.1,154.6 227.3,154.6 227.3,134.4 273.1,134.4
NetC107_2 on Top Layer "NETC107_2_L01_P012" (solid, pour order 12): 273,109.6 227.2,109.6 227.2,89.2 273,89.2
NetC105_2 on Top Layer "NETC105_2_L01_P010" (solid, pour order 10): 273.1,200.7 227.3,200.7 227.3,180.5 273.1,180.5
NetL103_2 on Top Layer "NETL103_2_L01_P009" (solid, pour order 9): 223.2,109.8 200.5,109.8 200.5,100 223.275,100
NetL102_2 on Top Layer "NETL102_2_L01_P008" (solid, pour order 8): 223.2,154.6 200.6,154.6 200.6,145.3 223.271,145.3
NetP107_1 on Top Layer "NETP107_1_L01_P003" (solid, pour order 3): 88.9,228.9 70.333,228.9 70.333,192.2 62.8,192.2 62.8,181 88.9,181
GND on Top Layer "GND_L01_P002" (solid, pour order 2): 53.9,230 53.9,195.2 53.8,195.1 40.6,195.1 40.5,195.2 40.5,98.2 27.3,98.2 27.3,212.9 37,212.9 37,230
+10 on Layer 1 "NONET_L-01_P-001" (solid, pour order 35): 213.157,220.828 213.157,163.641 103.965,164.398 103.965,205.537 68.047,205.537 68.047,201.651 89.683,201.651 89.683,164.398 77.902,164.398 77.902,154.711 84.709,154.711 84.709,151.105 213.157,151.105 213.157,98.933 229.591,98.933 229.591,220.828
NetC406_2 on Layer 1 "NETC406_2_L02_P034" (solid, pour order 34): 55.6,87.3 55.6,68.682 108.188,68.682 108.188,63.195 110.744,63.195 110.791,68.682 135.809,68.682 135.809,66.751 138.557,66.751 138.595,68.682 168.565,68.682 168.565,66.99 171.145,66.99 171.145,68.682 200.521,68.682 200.521,66.012 203.19,66.012 203.19,68.682 230.923,68.682 230.923,66.37 233.68,66.335 233.68,68.682 263.866,68.682 263.866,66.167 266.9,66.167 266.9,73.4 65.1,73.4 65.1,87.1 64.9,87.3
GND on Layer 1 "NONET_L-01_P-001" (solid, pour order 37): 35.966,98.247 36.093,98.12 167.615,98.12 167.615,138.227 167.742,138.354 141.58,138.354 141.199,138.735 141.199,112.319 141.072,112.192 36.754,112.192 35.966,112.141
GND on Bottom Layer "NONET_L-01_P-001" (solid, pour order 41): 38.273,97.887 38.227,97.841 38.266,95.047 63.246,95.047 73.421,83.541 140.569,83.541 140.569,80.518 147.604,80.518 147.701,85.801 80.035,85.801 67.95,97.887
+10 on Bottom Layer "NONET_L-01_P-001" (solid, pour order 36): 77.902,164.211 77.902,154.686 84.684,154.686 84.709,154.711 84.709,151.105 99.619,151.105 99.644,151.13 99.644,164.211 77.978,164.211
GND on Layer 2 "NONET_L-01_P-001" (solid, pour order 39): 26.568,97.46 101.117,97.46 101.117,118.821 61.544,118.821 61.544,150.292 101.117,150.292 101.117,168.67 53.416,168.67 53.416,217.246 259.131,217.246 260.045,217.246 260.655,217.246 260.655,199.466 158.775,199.466 158.775,174.447 272.263,174.447 272.517,174.193 272.517,157.175 270.713,157.175 158.775,157.175 158.775,123.901 271.501,123.901 271.501,109.83 154.127,109.83 154.127,88.544 269.4,88.544 269.4,38.76 88.519,38.76 88.519,75.209 26.536,75.209

## Silkscreen, mask and mechanical layers (free items; w line width, h text height)
Top Overlay:
  text "Line Commutated Converter" at 220.701,228.524 h1.52
Mechanical 1:
  the board outline again, w0.15

## Text inside footprints (layer, text, board x,y; h text height)
P106: Top Overlay "16" at 87.984,43.032 h1.27; Top Overlay "15" at 87.984,40.492 h1.27; Top Overlay "1" at 66.14,40.492 h1.27; Top Overlay "2" at 66.14,43.032 h1.27